# Altium PCB BA100_CPU_V1.0.PcbDoc
Units mm, origin at the board's own origin, x right, y up, seen from the top; angles counter-clockwise.
Board outline 152.4 x 101.6 mm, 2 copper layers (Top Layer, Bottom Layer); 85 components, 63 nets, 266 pads, 162 vias.
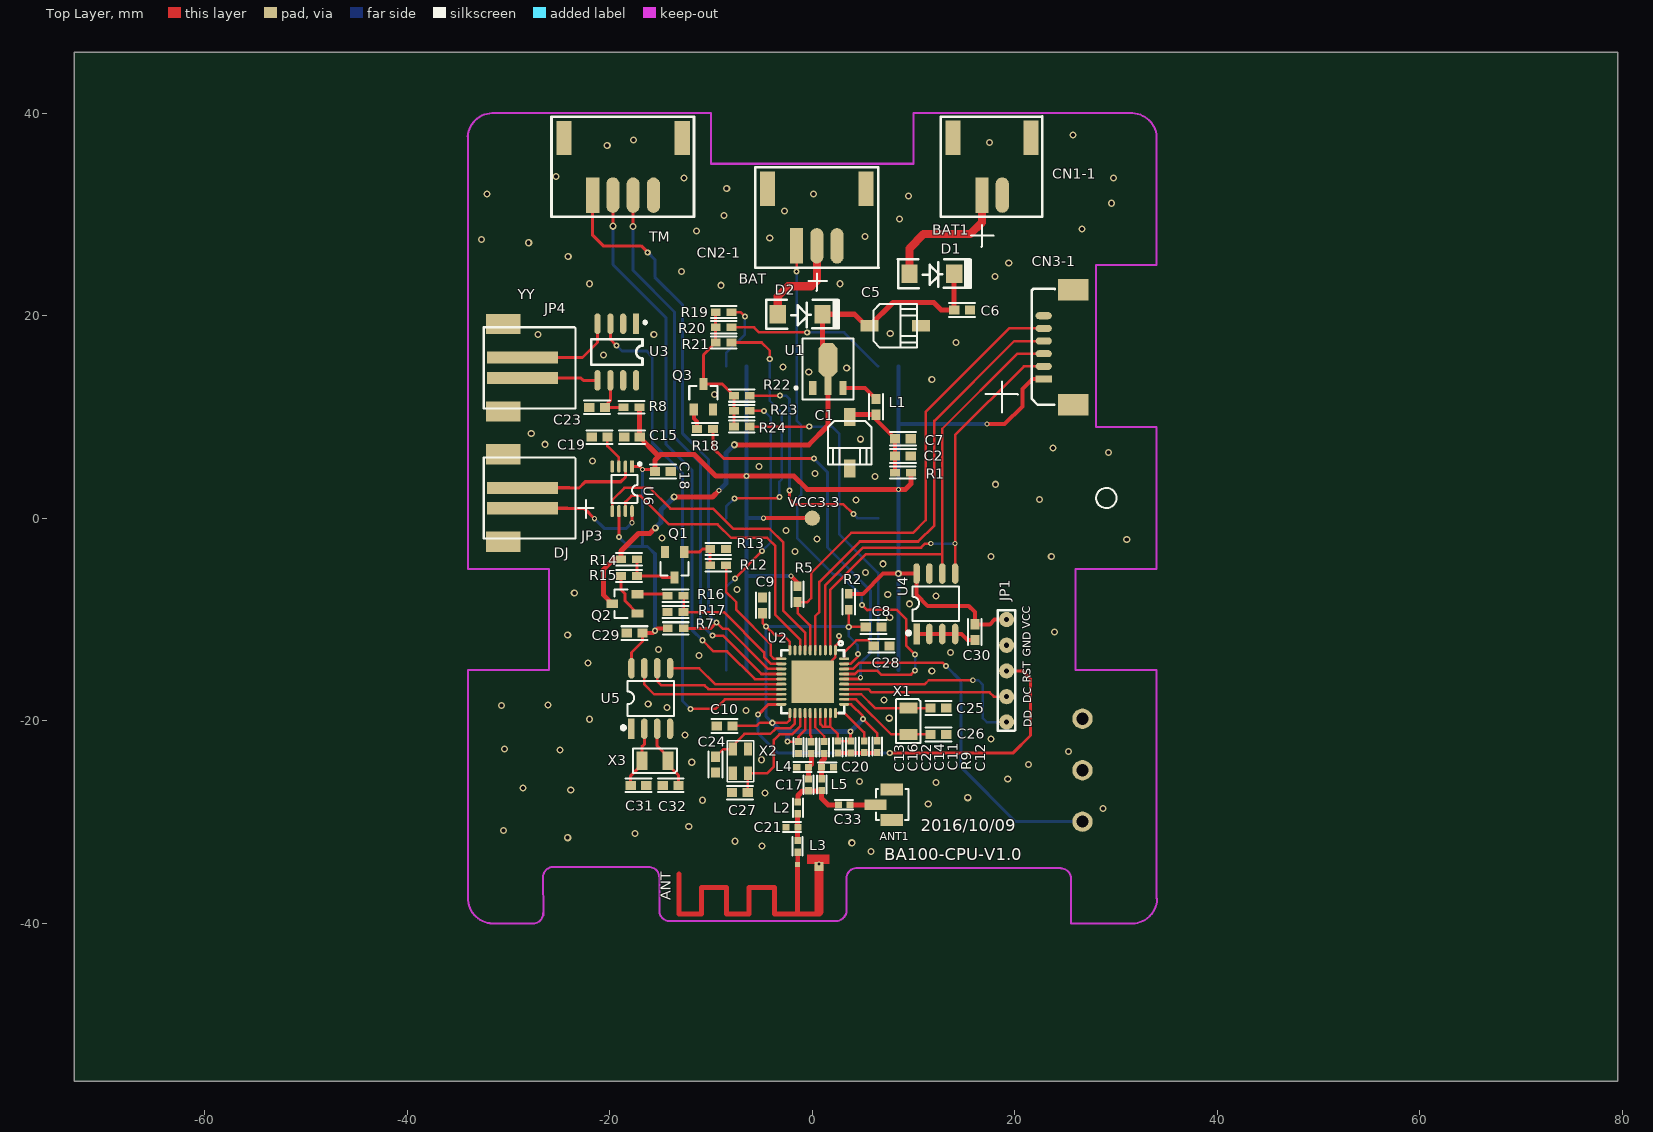
[diagram p0: Top Layer view]
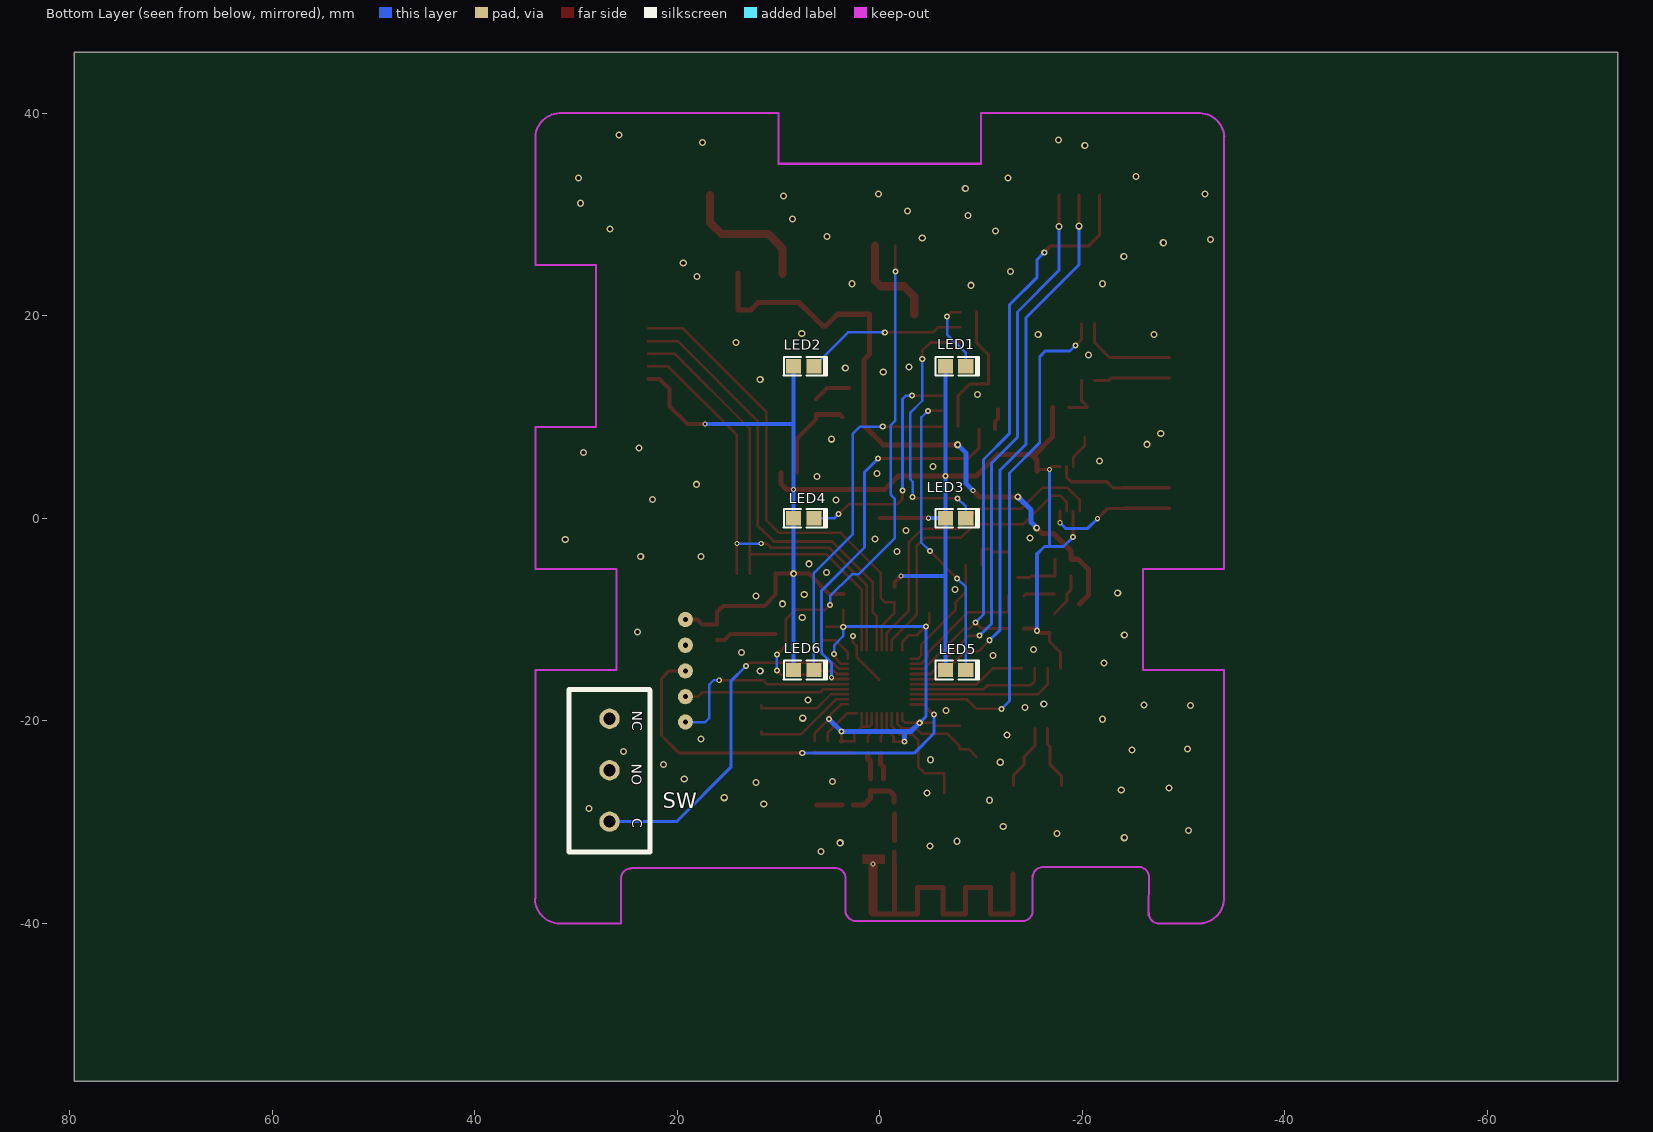
[diagram p1: Bottom Layer view, seen from below]

## Layer stack, top to bottom
Top Solder: solder mask 0.0102, Solder Resist, Dk 3.5
Top Layer: signal copper 0.0356
Dielectric1: dielectric 0.32, FR-4, Dk 4.8
Bottom Layer: signal copper 0.0356
Bottom Solder: solder mask 0.0102, Solder Resist, Dk 3.5

## Board outline
-72.871,-55.595 79.529,-55.595 79.529,46.005 -72.871,46.005

## Design rules (kind name [scope] priority, off if disabled: settings)
Clearance [All] p1: gap=0.3
ComponentClearance [All] p1 off: gap=0.254 collisioncheckmode=3 verticalgap=0.254 showdistances=FALSE
FabricationTestPointUsage TestPointUsage [All] p1: valid=0 allowmultiple=FALSE
FabricationTestpoint Testpoint [All] p1: side=3 testpointundercomponent=TRUE minsize=1.016 maxsize=2.54 preferedsize=1.524 minholesize=0 maxholesize=1.016 preferedholesize=0.813 testpointgrid=0.025 allowsidetop=TRUE allowsidebottom=TRUE usegrid=TRUE gridtolerance=0
Height [All] p1 off: minheight=0 maxheight=25.4 prefheight=12.7
PlaneClearance [All] p1: clearance=0.3
PlaneConnect [All] p1: planeconnectstyle=Relief reliefexpansion=0.508 reliefentries=4 reliefconductorwidth=0.3 reliefairgap=0.3
PolygonConnect PolygonConnect_1 [IsVia] p1: connectstyle=Direct reliefconductorwidth=0.254 reliefentries=4 polygonreliefangle="90 Angle" airgapwidth=0.254
PolygonConnect [All] p2: connectstyle=Relief reliefconductorwidth=0.254 reliefentries=4 polygonreliefangle="90 Angle" airgapwidth=0.254
RoutingVias [All] p1: holewidth=0.4 width=0.7 viastyle="Through Hole" minholewidth=0.3 minwidth=0.5 maxholewidth=0.7 maxwidth=1.2
SolderMaskExpansion [All] p1: expansion=0.102
UnpouredPolygon [All] p1: allowunpoured=FALSE
Width [All] p1: maxlimit=1 minlimit=0.1 preferedwidth=0.3 minimp=50.000000 maximp=50.000000 favimp=50.000000
23 further rules are at their usual default settings.

## Components (designator, comment, footprint, x,y, rotation, side; value= is the part's Value field where it differs from the comment)
ANT "ANT" ANT -1.451,-34.185 r180 top
ANT1 "ANT" IPEX 6.25,-28.3 r180 top
C1 "10uf/16V,electro" ECAP_10U_4.3*4.3 3.7,7.45 r270 top
C2 "0.1uf" PC7-*****-KO-0A_0603_TDK 8.95,6.15 r180 top
C5 "10uf/16V,electro" ECAP_10U_4.3*4.3 8.2,19 r0 top
C6 "0.1uf" PC5-*****-**-0A_0603_TDK 14.8,20.55 r180 top
C7 "2.2uf" PC5-*****-**-0A_0603_TDK 8.95,7.85 r0 top
C8 "1uf" PC5-*****-**-0A_0603_TDK 6.05,-10.741 r0 top
C9 "0.1uf" PC7-*****-KO-0A_0603_TDK -4.9,-8.6 r90 top
C10 "0.1uf" PC5-*****-**-0A_0603_TDK -8.661,-20.515 r180 top
C11 "0.1uf" PC7-*****-KQA0A_0402_YAGEO 3.789,-22.596 r270 top
C12 "0.1uf" PC7-*****-KQA0A_0402_YAGEO 6.419,-22.555 r270 top
C13 "0.1uf" PC7-*****-KQA0A_0402_YAGEO -1.361,-22.635 r270 top
C14 "220pf" PC7-*****-KQA0A_0402_YAGEO 2.52,-22.596 r90 top
C15 "1uf" PC5-*****-**-0A_0603_TDK -17.8,8 r0 top
C16 "18p" PC7-*****-KQA0A_0402_YAGEO -0.091,-22.655 r270 top
C17 "1p" PC7-*****-KQA0A_0402_YAGEO -0.371,-26.335 r270 top
C18 "0.1uf" PC5-*****-**-0A_0603_TDK -14.75,4.6 r180 top
C19 "1uf" PC5-*****-**-0A_0603_TDK -21,8 r0 top
C20 "1p" PC7-*****-KQA0A_0402_YAGEO 1.5,-24.6 r0 top
C21 "1p" PC7-*****-KQA0A_0402_YAGEO -2,-30.5 r0 top
C22 "18p" PC7-*****-KQA0A_0402_YAGEO 1.179,-22.645 r270 top
C23 "1uf" PC5-*****-**-0A_0603_TDK -21.25,10.95 r180 top
C24 "27p" PC7-*****-KO-0A_0603_TDK -9.551,-24.335 r90 top
C25 "15P" PC5-*****-**-0A_0603_TDK 12.45,-18.745 r180 top
C26 "15P" PC7-*****-KO-0A_0603_TDK 12.45,-21.35 r180 top
C27 "27p" PC7-*****-KO-0A_0603_TDK -7.15,-27.1 r0 top
C28 "1uf" PC5-*****-**-0A_0603_TDK 6.85,-12.6 r180 top
C29 "0.1uf" PC7-*****-KO-0A_0603_TDK -17.55,-11.35 r180 top
C30 "0.1uf" PC5-*****-**-0A_0603_TDK 16.05,-11.25 r90 top
C31 "15P" PC7-*****-KO-0A_0603_TDK -17.161,-26.375 r0 top
C32 "15P" PC7-*****-KO-0A_0603_TDK -13.981,-26.375 r180 top
C33 "20P" PC7-*****-KQA0A_0402_YAGEO 3.15,-28.3 r0 top
CN1-1 "CN1" PH2.0-2PIN-SMT 16.75,31.9 r0 top
CN2-1 "CN2" PH2.0-3PIN-SMT -1.55,26.9 r0 top
CN3-1 "touch" PH1.25-6PIN-SMT 22.849,13.745 r90 top
D1 "SS12" SS12-DIDEO 9.6,24.15 r0 top
D2 "SS12" SS12-DIDEO -3.4,20.15 r0 top
JP1 "debugger" ISCP-5PIN 19.189,-10.005 r270 top
JP3 "SIP2" PH2.0-2PIN-LSMT1 -28.611,1.985 r270 top
JP4 "SIP2" PH2.0-2PIN-LSMT1 -28.611,14.855 r270 top
L1 "BLM18HG102SN1" PC7-*****-KO-0A_0603_TDK 6.3,11 r270 top
L2 "1nH" PC5-*****-**-0A_0402_TDK -1.421,-28.6 r270 top
L3 "3nH" PC5-*****-**-0A_0402_TDK -1.451,-32.405 r270 top
L4 "2nH" PC5-*****-**-0A_0402_TDK -0.951,-24.575 r0 top
L5 "2nH" PC5-*****-**-0A_0402_TDK 0.929,-26.305 r270 top
LED1 "MA2X335" LED-0805 -7.5,15 r180 bottom locked
LED2 "MA2X335" LED-0805 7.5,15 r180 bottom locked
LED3 "MA2X335" LED-0805 -7.5,0 r180 bottom locked
LED4 "MA2X335" LED-0805 7.5,0 r180 bottom locked
LED5 "MA2X335" LED-0805 -7.5,-15 r180 bottom locked
LED6 "MA2X335" LED-0805 7.5,-15 r180 bottom locked
Q1 "BC847B" PTR-C0025-00-2A_2SC1623 -13.6,-4.6 r180 top
Q2 "BC857B" PTR-C0025-00-2A_2SC1623 -18.5,-8.45 r90 top
Q3 "SS8050" PTR-C0025-00-2A_2SC1623 -10.75,12 r0 top
R1 "0ohm" PRC-*****-AM-0A_0603 8.95,4.5 r0 top
R2 "0ohm" PRC-*****-AM-0A_0603 3.6,-8.25 r90 top
R5 "10k" PRC-*****-AM-0A_0603 -1.45,-7.5 r270 top
R7 "10k" PRC-*****-AM-0A_0603 -13.481,-10.875 r0 top
R8 "0ohm" PRC-*****-AM-0A_0603 -17.85,10.95 r0 top
R9 "56k" PRC-*****-BM-0A_0402 5.112,-22.569 r270 top
R12 "4.7K" PRC-*****-AM-0A_0603 -9.3,-4.65 r180 top
R13 "100K" PRC-*****-AM-0A_0603 -9.3,-3.05 r180 top
R14 "47K" PRC-*****-AM-0A_0603 -18.1,-4.05 r180 top
R15 "30K" PRC-*****-AM-0A_0603 -18.1,-5.7 r180 top
R16 "75K" PRC-*****-AM-0A_0603 -13.5,-7.65 r180 top
R17 "20K" PRC-*****-AM-0A_0603 -13.501,-9.265 r0 top
R18 "2.7K" PRC-*****-AM-0A_0603 -10.6,8.8 r180 top
R19 "560" PRC-*****-AM-0A_0603 -8.75,20.35 r180 top
R20 "560" PRC-*****-AM-0A_0603 -8.75,18.85 r180 top
R21 "560" PRC-*****-AM-0A_0603 -8.75,17.35 r180 top
R22 "560" PRC-*****-AM-0A_0603 -6.95,12.1 r180 top
R23 "560" PRC-*****-AM-0A_0603 -6.95,10.6 r180 top
R24 "560" PRC-*****-AM-0A_0603 -6.95,9.05 r180 top
SW "SW-weidong" SW-weidong 26.679,-24.885 r90 bottom
TM "TM" PH2.0-4PIN-SMT -21.681,31.905 r0 top (schematic designator JP2)
U1 "HT7333" SOT89 1.55,14.25 r0 top
U2 "CC2541" CC2530_QFN40 2.3,-13.05 r270 top
U3 "NVC080C" SOP-8 -17.4,19.2 r270 top
U4 "AT24C64N" PIC-00570-40-2A_93LC46B 12.2,-8.45 r90 top
U5 "DS1302Z" PIC-00570-40-2A_93LC46B -15.95,-17.8 r90 top
U6 "PT5102" PT5102 -17.8,5.1 r270 top
X1 "32.768KHZ,F=12.5P" FC-135 9.489,-20.045 r270 top
X2 "CY_3225" CY_3225 -7.421,-25.095 r90 top
X3 "32.768KHZ,F=6P" FC-135 -15.531,-23.955 r180 top

## Footprints (in the part's own frame and the unit in brackets; to place one, negate y for a bottom-side part, rotate by r counter-clockwise, add the part's x,y. Pads: shape width x height; smd on the part's side, far side on the other; paste and mask are expansions set on the pad)
ANT [mm]
  rect 0.5x0.5 smd: 1(0,0)
  rect 0.9x0.9 smd: 2(-2.1,0.2)
  Top Layer lines w0.5: 11.7,0.96 11.7,4.9 9.5,4.9 9.5,2.26 7,2.26 7,4.9 4.8,4.9 4.8,2.26 2.3,2.26 2.3,4.9 0,4.9 ; 0,0 0,4.9 ; -2.26,4.79 -2.21,4.84 -2.15,4.9 0,4.9
  Top Layer lines w0.9: -2.1,4.65 -2.1,0.2
CC2530_QFN40 [mm]
  oval 1x0.28 smd: 1(-0.011,-0.009) 2(-0.011,-0.509) 3(-0.011,-1.009) 4(-0.011,-1.509) 5(-0.011,-2.009) 6(-0.011,-2.509) 7(-0.011,-3.009) 8(-0.011,-3.509) 9(-0.011,-4.009) 10(-0.011,-4.509) 21(6.189,-4.509) 22(6.189,-4.009) 23(6.189,-3.509) 24(6.189,-3.009) 25(6.189,-2.509) 26(6.189,-2.009) 27(6.189,-1.509) 28(6.189,-1.009) 29(6.189,-0.509) 30(6.189,-0.009)
  oval 0.28x1 smd: 11(0.832,-5.359) 12(1.332,-5.359) 13(1.832,-5.359) 14(2.332,-5.359) 15(2.832,-5.359) 16(3.332,-5.359) 17(3.832,-5.359) 18(4.332,-5.359) 19(4.832,-5.359) 20(5.332,-5.359) 31(5.332,0.841) 32(4.832,0.841) 33(4.332,0.841) 34(3.832,0.841) 35(3.332,0.841) 36(2.832,0.841) 37(2.332,0.841) 38(1.832,0.841) 39(1.332,0.841) 40(0.832,0.841)
  rect 4.2x4.2 smd: 41(3.089,-2.259)
  silkscreen extent -0.91,-5.37 6.21,0.85
CY_3225 [mm]
  round 0.5 on Top Overlay: 0(-0.64,-2.06)
  rect 1.3x0.8 smd: 1(-0.095,-1.07) 2(2.293,-1.07) 3(2.293,0.428) 4(-0.095,0.428)
  silkscreen extent -0.91,-1.63 3.11,0.99
ECAP_10U_4.3*4.3 [mm]
  rect 1.8x1.1 smd: 1(2.54,0) 2(-2.54,0)
  silkscreen extent -2.15,-2.15 2.15,2.15
FC-135 [mm]
  rect 1.1x1.8 smd: 1(-1.3,0) 2(1.3,0)
  silkscreen extent -2.17,-1.2 2.15,1.19
IPEX [mm]
  rect 2.2x1 smd: 1(0,0)
  rect 2.2x1.2 smd: 2(-1.6,-1.5) 3(-1.6,1.49)
  silkscreen extent -3.24,-1.56 -0.05,1.51
ISCP-5PIN [mm]
  round 1.5 hole 0.5: 1(0,0) 2(2.54,0) 3(5.07,0) 4(7.62,0) 5(10.12,0)
  silkscreen extent -0.93,-0.89 11,0.84
LED-0805 [mm]
  rect 1.5x1.4 smd: A(-1,0) C(1,0)
  silkscreen extent -1.98,-0.93 2.28,0.93
PC5-*****-**-0A_0402_TDK [mm] "0402"
  rect 0.7x0.65 smd: 1(-0.58,0) 2(0.58,0)
  silkscreen extent -0.91,-0.48 0.89,0.48
PC5-*****-**-0A_0603_TDK [mm] "0603"
  rect 1.016x0.9 smd: 1(-0.775,0) 2(0.776,0)
  silkscreen extent -1.28,-0.68 1.28,0.68
PC7-*****-KO-0A_0603_TDK [mm] "0603"
  rect 1.016x0.9 smd: 1(-0.776,0) 2(0.776,0)
  silkscreen extent -1.28,-0.68 1.28,0.68
PC7-*****-KQA0A_0402_YAGEO [mm] "0402"
  rect 0.7x0.65 smd: 1(-0.58,0) 2(0.58,0)
  silkscreen extent -0.91,-0.48 0.89,0.48
PH1.25-6PIN-SMT [mm]
  rect 0.7x1.6 smd: 1(0,0)
  oval 0.7x1.6 smd: 2(1.25,0) 3(2.5,0) 4(3.75,0) 5(5,0) 6(6.25,0)
  rect 2.1x3 smd: 7(-2.55,-2.91) 8(8.8,-2.91)
  silkscreen extent -2.54,-1.11 8.89,1.18
PH2.0-2PIN-LSMT1 [mm]
  rect 1.2x7 smd: 1(-1.005,0) 2(1.005,0)
  rect 2x3.4 smd: 3(-4.318,-1.905) 4(4.318,-1.905)
  silkscreen extent -4,-3.84 4,5.24
PH2.0-2PIN-SMT [mm]
  rect 1.3x3.5 smd: 1(0.01,0.01)
  oval 1.3x3.5 smd: 2(2.01,0.01)
  rect 1.5x3.4 smd: 3(-2.85,5.65) 4(4.85,5.65)
  silkscreen extent -4.06,-2.15 5.98,7.8
PH2.0-3PIN-SMT [mm]
  rect 1.3x3.5 smd: 1(0,0)
  oval 1.3x3.5 smd: 2(2,0) 3(3.99,-0.01)
  rect 1.5x3.4 smd: 4(-2.86,5.64) 5(6.85,5.64)
  silkscreen extent -4.07,-2.17 8.1,7.75
PH2.0-4PIN-SMT [mm]
  rect 1.3x3.5 smd: 1(0,0)
  oval 1.3x3.5 smd: 2(2,0) 3(3.99,-0.01) 4(6,-0.01)
  rect 1.5x3.4 smd: 5(-2.85,5.64) 6(8.85,5.64)
  silkscreen extent -4.07,-2.16 10,7.75
PIC-00570-40-2A_93LC46B [mil] "SOIC-8"
  rect 80x25 smd: 1(-117.5,75)
  oval 80x25 smd: 2(-117.5,25) 3(-117.5,-25) 4(-117.5,-75) 5(117.5,-75) 6(117.5,-25) 7(117.5,25) 8(117.5,75)
  silkscreen extent -119,-90 67,111
PRC-*****-AM-0A_0603 [mm] "0603"
  rect 0.966x0.762 smd: 1(-0.785,0) 2(0.785,0)
  silkscreen extent -1.26,-0.6 1.27,0.6
PRC-*****-BM-0A_0402 [mm] "0402"
  rect 0.7x0.65 smd: 1(-0.58,0) 2(0.58,0)
  silkscreen extent -0.91,-0.48 0.89,0.48
PT5102 [mm]
  rect 1.2x0.35 smd: 1(0,0)
  oval 1.2x0.35 smd: 2(-0.006,-0.65) 3(-0.006,-1.3) 4(-0.006,-1.95) 5(4.4,-1.95) 6(4.4,-1.3) 7(4.4,-0.65) 8(4.4,0)
  silkscreen extent -0.38,-2.03 3.58,0.89
PTR-C0025-00-2A_2SC1623 [mm]
  rect 0.816x1.174 smd: B(-0.95,-1.25) C(0,1.251) E(0.95,-1.25)
  silkscreen extent -1.4,-0.26 1.4,1.04
SOP-8 [mil]
  rect 80x24 smd: 1(0,0)
  oval 80x24 smd: 2(0,-50) 3(0,-100) 4(0,-150) 5(220,-150) 6(220,-100) 7(220,-50) 8(220,0)
  silkscreen extent -10,-175 160,40
SOT89 [mm] "SOT-89; Body 4.6 x 4.25 mm, inc. leads (LxW max)"
  oct 1.9x3.3 smd: 0(0,1.388)
  rect 0.7x1.35 smd: 1(-1.5,-1.388) 3(1.5,-1.388)
  rect 0.7x1.8 smd: 2(0,-1.162)
  silkscreen extent -3.27,-2.51 2.5,3.49
SS12-DIDEO [mm]
  rect 1.6x1.8 smd: 1(4.41,-0.01) 2(-0.01,-0.01)
  silkscreen extent -1.14,-1.43 6.03,1.44
SW-weidong [mm]
  round 2 hole 1.2: 1(-5.08,0) 2(0,0) 3(5.08,0)
  silkscreen extent -8.08,-4.01 7.95,4.01

## Part data
C1 C2 C5 C6 C7 C8 C9 C10 C11 C12 C13 C14 C15 C16 C17 C18 C19 C20 C21 C22 C23 C24 C25 C26 C27 C28 C29 C30 C31 C32 C33: library part PC7_0402_YAGEO, "PC7-*****-KQA0A"
CN1-1 JP3 JP4: library part CON2, "Connector"
CN2-1: library part JP1_E524.03
CN3-1: library part CON6
D1 D2: library part PDD_SD101CWS, "PDD-00330-00-2A"
JP1: library part CON5
L1 L2 L3 L4 L5: library part PWL_18nH, "PWL-00195-00-20"
LED1 LED2 LED3 LED4 LED5 LED6: library part PDD_MA2X335, "LED"
Q1: library part PTR_2SC3356, "PTR-C0028-00-2A"
Q2: library part PTR-PNP
Q3: library part PTR_2SC5344SF-Y, "PTR-C0230-00-20**"
R1 R2 R5 R7 R8 R9 R12 R13 R14 R15 R16 R17 R18: library part PRC_0603, "PRC-*****-AM-0A_0603"
R19 R20 R21 R22 R23 R24: library part RES
TM: library part "HDR1X4 ***"
U1: library part LM117K
U3: library part NV040C
U5: library part DS1302
U6: library part Component_1_1
X1: library part CRYSTAL, "Crystal"
X3: library part PTR_16MHZ, "PTR-X0320-20-2A"

## Free pads (board coordinates)
  round 1.5 smd: 0(0,0)

## Via types
v1: diameter 0.7, hole 0.4, Top Layer to Bottom Layer, 108 vias
v2: diameter 0.6, hole 0.3, Top Layer to Bottom Layer, 37 vias
v3: diameter 0.508, hole 0.3, Top Layer to Bottom Layer, 13 vias
v4: diameter 0.7, hole 0.35, Top Layer to Bottom Layer, 4 vias

## Nets (pads, with @x,y where several pads share a name; then routed paths per layer and width w, separated by ;. In a path a pad name is that pad's centre, name@x,y a point inside that pad or via, vN(x,y) a via of type N, cw(c..) or ccw(c..) an arc to the next point about the centre after c; other vN are vias at no path point)
AD: R16.1 R17.2 U2.12 | length 13.6
  Top Layer w0.25: R16.1@-12.696,-7.665 -12.696,-9.245 R17.2 -8.735,-9.265 -4.75,-13.25 -4.75,-13.7 -4.068,-14.382 U2.12
DC: JP1.4 U2.34 | length 16.4
  Top Layer w0.25: U2.34 5.532,-16.882 5.85,-17.2 17.5,-17.2 17.925,-17.625 JP1.4
DD: JP1.5 U2.35 | length 19.8
  Top Layer w0.25: U2.35 11.118,-16.382 11.5,-16 v3(15.85,-16)
  Bottom Layer w0.25: v3(15.85,-16) 16.4,-16 16.85,-16.45 16.85,-19.75 17.225,-20.125 JP1.5
DJ1: U2.7 U6.5 | length 32.3
  Top Layer w0.25: U6.5 -19.75,1.8 -18.55,3 -16.05,3 -14,0.95 -9.8,0.95 -7.8,-1.05 -4.2,-1.05 -2.85,-2.4 -2.85,-9.15 -0.709,-11.291 U2.7
DJ2: U2.8 U6.7 | length 29.3
  Top Layer w0.25: U6.7 -18.45,1.6 -17.85,2.2 -16.95,2.2 -14.15,-0.6 -9.35,-0.6 -8,-1.95 -4.45,-1.95 -3.65,-2.75 -3.65,-9.55 -1.209,-11.991 U2.8
GND: C1.1 C2.1 C5.1 C6.1 C7.2 C8.2 C9.2 C10.2 C11.2 C12.2 C13.2 C14.1 C15.1 C18.1 C19.1 C20.2 C21.1 C23.2 C24.1 C25.1 C26.1 C27.1 C28.1 C29.2 C30.1 C31.2 C32.2 CN1-1.2 CN2-1.3 CN3-1.6 JP1.2 L4.1 Q1.E Q3.E R9.2 R13.1 R17.1 TM.4 U1.1 U2.1 U2.41 U3.7 U4.1 U4.2 U4.3 U4.4 U4.7 U5.4 U6.4 X2.2 X2.4 | length 15.3
  Top Layer w0.25: U2.41@0.041,-15.959 2.291,-13.709 U2.1 2.291,-12.609 2.65,-12.25 v2(2.65,-11.65)
  Top Layer w0.4: C14.1 6.378,-23.176 C12.2 ; U4.1 U4.2 U4.3 U4.4 14.735,-11.435 15.325,-12.025 C30.1
  other v1: 5.8,-32.9 -4.95,-32.35 3.9,-32.05 -7.65,-31.9 -24.15,-31.55 -17.5,-31.15 -30.5,-30.85 -12.2,-30.45 28.7,-28.65 11.45,-28.2 -10.85,-27.85 15.35,-27.6 -4.65,-27.15 -23.85,-26.85 -28.55,-26.65 12.2,-26.1 4.65,-26 19.3,-25.75 21.35,-24.3 -11.9,-24.1 -5,-23.85 25.3,-23.05 -24.9,-22.9 -30.4,-22.8 17.65,-21.8 -12.55,-21.4 -22,-19.85 7.6,-19.75 -6.55,-19 -14.35,-18.7 -30.7,-18.5 -26.1,-18.45 -16.2,-18.35 7.1,-17.95 11.8,-15.1 -22.15,-14.3 -11.2,-13.55 13.65,-13.25 -15.2,-12.95 -24.15,-11.55 23.9,-11.25 7.65,-9.8 9.6,-8.45 12.2,-7.7 7.45,-7.55 -23.5,-7.4 -7.45,-7.05 5.25,-5.35 7,-4.5 17.65,-3.8 23.6,-3.8 -1.7,-3.3 31.05,-2.1 0.45,-2.05 -14.85,-1.95 -2.6,-1.2 4.3,1.8 22.45,1.85 18.1,3.35 6.2,4.1 0.25,4.4 -5.25,5.1 -21.7,5.65 29.25,6.5 23.75,6.95 -26.4,7.3 4.75,7.8 -27.75,8.35 -9.65,12.2 11.8,13.7 -0.35,14.45 3.4,14.85 -2.9,14.95 -20.6,16.1 14.2,17.35 -27.1,18.15 -15.65,18.15 7.7,18.25 -9,23 -22,23.15 2.75,23.15 18.05,23.85 -12.9,24.35 19.4,25.2 -24.1,25.85 -28,27.2 -32.65,27.5 -4.2,27.65 5.2,27.8 -11.45,28.35 26.65,28.55 8.6,29.55 -8.7,29.9 -2.75,30.35 29.55,31.1 9.5,31.8 -32.1,32 0.1,32 -8.45,32.55 -12.65,33.6 29.75,33.6 -25.3,33.75 -20.25,36.8 17.5,37.1 -17.65,37.35 25.75,37.85
  other v3: 0.65,-34.15
HI: CN3-1.5 R5.2 U2.6 | length 48.4
  Top Layer w0.25: R5.2@-1.45,-8.335 -1.45,-9.35 -0.209,-10.591 U2.6 ; R5.2 -0.485,-8.285 -0.1,-7.9 -0.1,-5.4 3.85,-1.45 9.95,-1.45 11.2,-0.2 11.2,10.5 19.445,18.745 CN3-1.5
LED_BACK: R18.1 U2.36 | length 38.3
  Top Layer w0.3: R18.1 -9.815,6.965 -8.75,5.9 v2(0.15,5.9) ; U2.36 4.618,-15.882 v3(4.75,-15.75)
  Bottom Layer w0.3: v2(0.15,5.9) 1.5,4.55 1.5,-2.9 5.75,-7.15 5.75,-13.3 4.75,-14.3 v3(4.75,-15.75)
NetANT1_1: ANT1.1 C33.2 | length 2.5
  Top Layer w0.5: C33.2 ANT1.1
NetANT_1: ANT.1 L3.2 | length 1.2
  Top Layer w0.45: ANT.1 L3.2
NetC1_2: C1.2 C2.2 C7.1 L1.2 R1.1 | length 9.2
  Top Layer w0.3: R1.1 R1.1@8.175,4.51
  Top Layer w0.4: C1.2 C1.2@3.935,10.225 ; L1.2 6.3,9.725 C7.1 R1.1@8.175,4.51
  Top Layer w0.5: C1.2@3.935,10.225 L1.2
NetC8_1: C8.1 C9.1 C10.1 C11.1 C12.1 C13.1 C14.2 R2.1 U2.10 U2.21 U2.24 U2.27 U2.28 U2.29 U2.31 U2.39 | length 67.4
  Top Layer w0.25: C10.1 -5.515,-20.515 -5.2,-20.2 v2(-3.95,-20.2) -2.5,-20.2 -2.209,-19.909 U2.21 ; C9.1 -4.9,-10.35 v2(-4.55,-10.7) -3.7,-11.55 -2.9,-11.55 -2.209,-12.241 U2.10 ; v2(-2.45,-22.055) C13.1 ; C13.1@-1.459,-21.956 C13.1 ; U2.24 -0.709,-20.909 -1.361,-21.561 C13.1 ; U2.27 0.791,-20.341 1.041,-20.591 1.291,-20.591 ; U2.28 1.291,-20.591 ; U2.29 1.791,-20.509 1.709,-20.591 ; U2.31 3.832,-18.382 5,-19.55 v2(5,-19.839) 6.419,-21.258 C12.1 ; U2.39 3.768,-14.382 4.5,-13.65 v2(4.5,-13.4) ; R2.1 v2(3.6,-10.741) C8.1 ; C11.1 C14.2 2.52,-21.32 1.791,-20.591 1.709,-20.591 ; 1.291,-20.591 1.709,-20.591
  Top Layer w0.3: C11.1 v2(3.789,-21.05)
  Bottom Layer w0.25: v2(3.6,-10.741) 3.6,-11.65 4.5,-12.55 v2(4.5,-13.4)
  Bottom Layer w0.3: v2(-3.95,-20.2) -4.55,-19.6 v2(-4.55,-10.7) 3.558,-10.7 v2(3.6,-10.741)
  Bottom Layer w0.5: v2(-3.95,-20.2) -3.1,-21.05 v2(3.789,-21.05) v2(5,-19.839) ; v2(-2.45,-22.055) -2.45,-21.1
NetC16_1: C16.1 U2.25 | length 2.9
  Top Layer w0.25: U2.25 -0.209,-21.432 -0.091,-21.55 C16.1
NetC16_2: C16.2 C17.1 L4.2 | length 2.6
  Top Layer w0.5: C17.1 L4.2 -0.091,-24.295 C16.2
NetC17_2: C17.2 C33.1 L2.1 L5.2 | length 5.9
  Top Layer w0.5: L2.1 -1.421,-27.371 -0.965,-26.915 C17.2 0.899,-26.915 L5.2 0.929,-27.679 1.55,-28.3 C33.1
NetC19_2: C19.2 U6.3 | length 3.4
  Top Layer w0.25: C19.2 -20.224,7.124 -19.1,6 U6.3
NetC20_1: C20.1 C22.2 L5.1 | length 2.6
  Top Layer w0.5: L5.1 0.92,-25.716 C20.1 0.92,-24.03 1.179,-23.771 C22.2
NetC21_2: C21.2 L2.2 L3.1 | length 2.6
  Top Layer w0.5: L3.1 L2.2@-1.451,-29.21
NetC22_1: C22.1 U2.26 | length 3.2
  Top Layer w0.25: U2.26 0.291,-20.641 1.179,-21.529 C22.1
NetC23_1: C23.1 R8.1 U3.6 | length 4.6
  Top Layer w0.3: C23.1 R8.1 ; C23.1@-20.475,11.075 -19.94,11.61 U3.6
NetC24_2: C24.2 U2.22 X2.3 | length 10.4
  Top Layer w0.25: C24.2 -8.794,-22.802 X2.3 -7.849,-22.449 -6.7,-21.3 -4.15,-21.3 -3.6,-20.75 -2.2,-20.75 -1.709,-20.259 U2.22
NetC25_2: C25.2 U2.33 X1.1 | length 9.1
  Top Layer w0.25: U2.33 4.832,-17.382 6.195,-18.745 X1.1 C25.2
NetC26_2: C26.2 U2.32 X1.2 | length 10
  Top Layer w0.25: U2.32 4.332,-17.882 7.795,-21.345 X1.2 11.669,-21.345 C26.2 ; C26.2@11.669,-21.095 C26.2@11.675,-21.1
NetC27_2: C27.2 U2.23 X2.1 | length 11.8
  Top Layer w0.25: C27.2 -6.351,-27.076 X2.1 -4.49,-25.19 -3.8,-24.5 -3.8,-21.9 -3.25,-21.35 -2,-21.35 -1.209,-20.559 U2.23
NetC28_2: C28.2 U2.40 | length 4.3
  Top Layer w0.25: U2.40 3.141,-13.259 4.35,-12.05 5.524,-12.05 C28.2
NetC31_1: C31.1 U5.2 X3.2 | length 6.2
  Top Layer w0.3: C31.1 -17.936,-25.436 -16.831,-24.331 X3.2 -16.831,-22.581 -16.585,-22.335 U5.2
NetC32_1: C32.1 U5.3 X3.1 | length 6.5
  Top Layer w0.3: U5.3 -15.315,-22.485 -14.231,-23.569 X3.1 -14.231,-24.369 -13.205,-25.395 C32.1
NetCN1-1_1: CN1-1.1 D1.2 | length 13.4
  Top Layer w0.8: D1.2 9.59,26.64 11,28.05 15.6,28.05 16.76,29.21 CN1-1.1
NetCN2-1_2: CN2-1.2 D2.2 | length 9.7
  Top Layer w0.8: D2.2 -3.41,21.89 -2.4,22.9 -0.1,22.9 0.45,23.45 CN2-1.2
NetJP4_1: JP4.1 U3.4 | length 9.9
  Top Layer w0.3: JP4.1 -22.69,15.86 -21.21,17.34 U3.4
NetJP4_2: JP4.2 U3.5 | length 7.5
  Top Layer w0.3: JP4.2 -22.85,13.85 -22.612,13.612 U3.5
NetL1_1: L1.1 U1.3 | length 3.7
  Top Layer w0.4: U1.3 5.213,12.862 L1.1
NetLED1_C: LED1.C R19.1 | length 7.2
  Top Layer w0.25: R19.1 -7.1,20.35 v2(-6.65,19.9)
  Bottom Layer w0.25: LED1.C -8.5,16.3 -6.65,18.15 v2(-6.65,19.9)
NetLED2_C: LED2.C R20.1 | length 16.1
  Top Layer w0.25: R20.1 -5.75,18.85 -5.25,18.35 v2(-0.5,18.35)
  Bottom Layer w0.25: v2(-0.5,18.35) 3.15,18.35 LED2.C
NetLED3_C: LED3.C R21.1 | length 25.9
  Top Layer w0.25: R21.1 -5,17.35 -4.2,16.55 v2(-4.2,15.7) ; v2(-7.7,1.95) -3.4,1.95 v2(-3.25,2.1)
  Bottom Layer w0.25: LED3.C -8.5,1.15 v2(-7.7,1.95) ; v2(-4.2,15.7) -4.2,11.6 -3,10.4 -3,3.85 -3.25,3.6 v2(-3.25,2.1)
NetLED4_C: LED4.C R22.1 | length 23.4
  Top Layer w0.25: R22.1 v2(-3.2,12.1) ; v2(-2.25,2.75) -2.25,1.9 -1.75,1.4 3.05,1.4 v2(4.05,0.4)
  Bottom Layer w0.25: v2(-3.2,12.1) -2.6,12.1 -2.25,11.75 v2(-2.25,2.75) ; v2(4.05,0.4) 4.45,0 LED4.C
NetLED5_C: LED5.C R23.1 | length 29.1
  Top Layer w0.25: v2(-7.65,-5.95) v2(-4.95,-3.25) ; R23.1 v2(-4.75,10.6)
  Bottom Layer w0.25: LED5.C -8.5,-6.8 v2(-7.65,-5.95) ; v2(-4.95,-3.25) -4.1,-2.4 -4.1,9.95 v2(-4.75,10.6)
NetLED6_C: LED6.C R24.1 | length 34
  Top Layer w0.25: R24.1 v2(-0.3,9.05)
  Bottom Layer w0.25: v2(-0.3,9.05) 1.95,9.05 2.65,8.35 2.65,-1.55 6.5,-5.4 LED6.C
NetQ1_B: Q1.B R12.2 R13.2 | length 4.3
  Top Layer w0.3: Q1.B -11.15,-3.35 -10.85,-3.05 R13.2 R12.2
NetQ1_C: Q1.C R14.1 R15.1 | length 5.4
  Top Layer w0.3: R14.1 R15.1 -15,-5.7 -14.849,-5.851 Q1.C
NetQ2_B: Q2.B R15.2 | length 4.4
  Top Layer w0.3: R15.2 -18.885,-7.065 -18.5,-7.45 -18.5,-8.15 Q2.B
NetQ2_E: Q2.E R16.2 | length 3.1
  Top Layer w0.3: Q2.E -14.431,-7.5 R16.2@-14.266,-7.665
NetQ3_B: Q3.B R18.2 | length 2.1
  Top Layer w0.4: Q3.B -11.7,9.85 -11.385,9.535 R18.2
NetQ3_C: Q3.C R19.2 R20.2 R21.2 R22.2 R23.2 R24.2 | length 14.1
  Top Layer w0.3: R19.2 R20.2 R21.2 -10.75,16.135 Q3.C -8.886,13.251 R22.2 R23.2 R24.2
NetR9_1: R9.1 U2.30 | length 4.5
  Top Layer w0.25: U2.30 3.201,-19.239 5.112,-21.15 R9.1
O1: JP3.1 U6.2 | length 11.7
  Top Layer w0.3: -24.01,2.99 -23.04,2.99 -22.43,3.6 -18.9,3.6 -18.45,4.05 U6.2
  Top Layer w0.35: JP3.1 -24.01,2.99
O2: JP3.2 U6.8 | length 13
  Top Layer w0.3: -24.18,0.98 -22.53,0.98 v3(-21.5,-0.05) ; v3(-17.8,-0.45) U6.8
  Top Layer w0.35: JP3.2 -24.18,0.98
  Bottom Layer w0.3: v3(-21.5,-0.05) -20.55,-1 -18.35,-1 v3(-17.8,-0.45)
P10: R12.1 U2.11 | length 11.9
  Top Layer w0.25: R12.1 -8.515,-7.285 -7.5,-8.3 -7.5,-9.05 -4.1,-12.45 -4.1,-13.55 -3.768,-13.882 U2.11
P16: SW.1 U2.38 | length 35.3
  Top Layer w0.25: U2.38 4.018,-14.882 4.65,-14.25 12.85,-14.25 v2(13.2,-14.6)
  Bottom Layer w0.3: v2(13.2,-14.6) 14.7,-16.1 14.7,-24.6 20.065,-29.965 SW.1
RST: JP1.3 U2.20 | length 41.3
  Top Layer w0.3: v2(-5.35,-19.4) -4.332,-18.382 U2.20 ; v2(7.65,-23.2) 19.8,-23.2 21.55,-21.45 21.55,-15.85 20.775,-15.075 JP1.3
  Bottom Layer w0.3: v2(-5.35,-19.4) -5.35,-21.25 -3.4,-23.2 v2(7.65,-23.2)
RST-S: CN2-1.1 U2.37 | length 56.8
  Top Layer w0.25: v2(-1.55,24.35) CN2-1.1 ; U2.37 4.218,-15.382 4.55,-15.05 6.4,-15.05 6.8,-15.45 9.75,-15.45 v2(10.15,-15.05) ; v2(4.9,-8.55) 5.45,-9.1 5.525,-9.025 8.325,-9.025 9.3,-10 9.3,-12.6 v2(10.15,-13.45)
  Bottom Layer w0.25: v2(-1.55,24.35) -1.55,9.65 -1.1,9.2 -1.1,2.3 -1.5,1.9 -1.5,-1.95 2.1,-5.55 2.75,-5.55 4.9,-7.7 v2(4.9,-8.55) ; v2(10.15,-15.05) v2(10.15,-13.45)
SCL: CN3-1.3 U2.2 U4.6 | length 45.9
  Top Layer w0.25: U2.2 1.791,-7.059 5.3,-3.55 12.835,-3.55 ; U4.6 12.835,-3.55 ; CN3-1.3 20.245,16.245 12.835,8.835 12.835,-3.55
SDA: CN3-1.2 U2.3 U4.5 | length 46.2
  Top Layer w0.25: U2.3 1.291,-6.609 5,-2.9 10.75,-2.9 11.15,-2.5 v3(11.7,-2.5) ; U4.5 v3(14.105,-2.5) 14.105,8.205 20.895,14.995 CN3-1.2
  Bottom Layer w0.25: v3(11.7,-2.5) v3(14.105,-2.5)
T-CE: U2.16 U5.5 | length 11.6
  Top Layer w0.25: U5.5 -11.167,-14.815 -9.6,-16.382 U2.16
T-I/O: U2.17 U5.6 | length 13.9
  Top Layer w0.25: U5.6 -15.315,-16.085 -14.9,-16.5 -10.632,-16.5 -10.25,-16.882 U2.17
T-SCLK: U2.18 U5.7 | length 15.5
  Top Layer w0.25: U5.7 -16.585,-16.415 -15.618,-17.382 U2.18
TM-DATA: R7.2 TM.1 U2.13 | length 61.2
  Top Layer w0.25: v2(-9.45,-10.3) -8.85,-10.9 -8.35,-10.9 -4.368,-14.882 U2.13
  Top Layer w0.3: TM.1 -21.681,27.931 -20.65,26.9 -16.9,26.9 v2(-16.25,26.25) ; R7.2 -10.025,-10.875 v2(-9.45,-10.3)
  Bottom Layer w0.3: v2(-16.25,26.25) -15.55,25.55 -15.55,23.8 -12.8,21.05 -12.8,8.35 -10.25,5.8 -10.25,-9.5 v2(-9.45,-10.3)
TM-LED+: TM.2 U2.15 | length 57
  Top Layer w0.25: v2(-10.85,-12.05) -9.75,-13.15 -8.4,-13.15 -5.668,-15.882 U2.15
  Top Layer w0.3: v1(-19.681,28.831) TM.2
  Bottom Layer w0.3: v1(-19.681,28.831) -19.681,25.031 -14.45,19.8 -14.45,7.3 -11.9,4.75 -11.9,-11 v2(-10.85,-12.05)
TM-LED-: TM.3 U2.14 | length 55.1
  Top Layer w0.25: v2(-9.85,-11.6) -8.8,-11.6 -5.018,-15.382 U2.14
  Top Layer w0.3: v1(-17.691,28.821) TM.3
  Bottom Layer w0.3: v1(-17.691,28.821) -17.691,24.459 -13.6,20.368 -13.6,8 -11.05,5.45 -11.05,-10.4 v2(-9.85,-11.6)
VCC: C15.2 C18.2 C29.1 C30.2 CN3-1.1 JP1.1 LED1.A LED2.A LED3.A LED4.A LED5.A LED6.A pad.0 R1.2 R2.2 R5.1 R7.1 R8.2 U4.8 U5.8 U6.1 U6.6 | length 175.9
  Top Layer w0.3: v2(-19.1,-1.85) U6.6 ; U5.8 -17.855,-13.255 -16.775,-12.175 C29.1 ; U6.1 -17.05,5.1 v3(-16.75,4.8) -15.726,4.8 C18.2 ; C15.2@-17.065,8.041 C15.2
  Top Layer w0.4: C29.1 -15.75,-11.35 v2(-15.512,-11.112) -15.275,-10.875 R7.1 ; v3(-4.8,0) pad.0 ; v3(-2.1,-5.7) -1.45,-6.35 R5.1@-1.45,-6.765 ; R2.2 4.985,-7.465 6.984,-5.466 U4.8 10.295,-7.545 11.4,-8.65 15.45,-8.65 16.05,-9.25 C30.2 17.526,-10.474 17.995,-10.005 JP1.1 ; v3(17.25,9.3) 19,9.3 20.75,11.05 20.75,12.75 21.745,13.745 CN3-1.1 CN3-1.1@22.844,13.75
  Top Layer w0.5: C15.2@-17.065,8.041 R8.2 ; C15.2 -15.324,6.3 ; C18.2 -15.526,5.751 -14.977,6.3 -11.65,6.3 -9.5,4.15 -1.8,4.15 -0.5,2.85 v3(8.5,2.85) 9.2,2.85 9.735,3.385 R1.2
  Bottom Layer w0.3: v2(-19.1,-1.85) -18.15,-2.8 -16.75,-2.8 ; v3(-16.75,4.8) -16.75,-2.8 ; -15.512,-3.55 -16.262,-2.8 -16.75,-2.8
  Bottom Layer w0.4: v2(-15.512,-11.112) -15.512,-3.55 ; LED5.A -6.5,-5.7 ; LED1.A v2(-6.5,4.15) LED3.A ; v3(-4.8,0) LED3.A ; v3(-2.1,-5.7) -6.5,-5.7 ; LED6.A LED4.A v3(8.5,2.85) 8.5,9.3 ; LED2.A 8.5,9.3 ; v3(17.25,9.3) 8.5,9.3 ; -6.5,-5.7 LED3.A
  other v4: 8.5,-5.466
VDD: C5.2 C6.2 D1.1 D2.1 Q2.C R14.2 U1.0 U1.2 | length 64.2
  Top Layer w0.5: Q2.C -20.6,-7.601 -20.6,-5.05 -19.6,-4.05 R14.2 -18.885,-3.235 -17.15,-1.5 -16.05,-1.5 v4(-15.5,-0.95) ; v4(-13.65,2.1) -9.85,2.1 v3(-9.2,2.75) ; v4(-7.7,7.25) -0.35,7.25 1.55,9.15 U1.2 U1.0 1.01,16.178 D2.1 4.16,20.14 5.3,19 C5.2 7.96,21.3 12,21.3 12.736,20.564 14.01,20.564 D1.1
  Bottom Layer w0.5: v4(-15.5,-0.95) -14.95,-0.4 -14.95,0.8 v4(-13.65,2.1) ; v3(-9.2,2.75) -8.5,3.45 -8.5,6.45 v4(-7.7,7.25)
XERS: CN3-1.4 U2.5 | length 44.9
  Top Layer w0.25: U2.5 0.291,-9.659 0.7,-9.25 0.7,-6.3 4.7,-2.3 10.45,-2.3 12.05,-0.7 12.05,9.6 19.945,17.495 CN3-1.4
YY: U2.19 U3.3 | length 52.1
  Top Layer w0.25: v2(-12.025,-18.825) -9.575,-18.825 -8.632,-17.882 U2.19
  Top Layer w0.28: U3.3 -19.94,17.64 v2(-19.35,17.05)
  Bottom Layer w0.28: v2(-19.35,17.05) -18.8,16.5 -16.35,16.5 -15.8,15.95 -15.8,7.45 -12.8,4.45 -12.8,-18.05 v2(-12.025,-18.825)
pads on no net: ANT1.2 ANT1.3 ANT.2 CN1-1.3 CN1-1.4 CN2-1.4 CN2-1.5 CN3-1.7 CN3-1.8 JP3.3 JP3.4 JP4.3 JP4.4 SW.2 SW.3 TM.5 TM.6 U2.4 U2.9 U3.1 U3.2 U3.8 U5.1 X2.0

## Keep-outs
Keep-Out Layer:
  lines w0.2: -34.021,37.675 cw(c-31.526,37.509) -31.361,40.004 ; -34,-37.665 -34,-15 -26,-15 -26,-5 -34,-5 -34,37.805 ; -33.991,-37.215 ccw(c-31.508,-37.51) -31.804,-39.993 ; -31.821,-40.015 -27.601,-40.015 ; -31.571,40 -10,40 -10,35 10,35 10,40 31.519,40 ; -27.598,-40.008 ccw(c-27.57,-39.008) -26.571,-38.965 ; -26.575,-35.265 -26.564,-39.215 ; -26.573,-35.321 cw(c-25.58,-35.438) -25.463,-34.445 ; -25.561,-34.435 -16.141,-34.435 ; -16.181,-34.445 cw(c-16.11,-35.442) -15.113,-35.372 ; -15.101,-38.915 -15.101,-35.305 ; -15.101,-38.825 ccw(c-14.102,-38.779) -13.965,-39.769 ; -14.024,-39.785 2.333,-39.785 ; 2.359,-39.785 ccw(c2.279,-38.665) 3.399,-38.585 ; 3.392,-35.603 cw(c4.389,-35.532) 4.469,-34.535 ; 3.399,-38.815 3.399,-35.545 ; 4.499,-34.545 24.535,-34.565 ; 24.546,-34.565 cw(c24.534,-35.58) 25.549,-35.591 ; 25.529,-40.035 31.849,-40.035 ; 25.549,-39.965 25.549,-35.58 ; 31.359,39.995 cw(c31.509,37.5) 34.005,37.65 ; 31.841,-40.018 ccw(c31.537,-37.537) 34.037,-37.576 ; 34,-37.537 34,-15 26,-15 26,-5 34,-5 34,9 28,9 28,25 34,25 34,37.735

## Other copper
Top Layer:
  rectangle net GND: -0.5,-34.15 1.706,-33.2
  rectangle net GND: -0.065,-34.15 1.4,-33.55

## Silkscreen, mask and mechanical layers (free items; w line width, h text height)
Top Overlay:
  circle w0.2: c29.03,1.99 r1
  lines w0.2: -23.141,0.995 -21.631,0.995 -21.621,0.985 ; -22.321,0.035 -22.321,1.815 ; -0.351,23.435 1.439,23.435 1.449,23.445 ; 0.419,22.455 0.459,22.495 0.459,24.175 ; 15.689,27.905 17.899,27.905 17.909,27.915 ; 16.709,26.795 16.739,26.825 16.739,28.975 ; 17.109,12.265 20.249,12.265 20.309,12.205 ; 18.739,10.415 18.739,13.495
  text "BAT1" at 11.85,28 h1
  text "BAT" at -7.25,23.15 h1
  text "YY" at -29.1,21.6 h1
  text "VCC3.3" at -2.4,1.1 h1
  text "DJ" at -25.55,-3.9 h1
  text "VCC" at 21.529,-10.935 h0.8 r90
  text "GND" at 21.559,-13.695 h0.8 r90
  text "RST" at 21.559,-16.245 h0.8 r90
  text "DC" at 21.629,-18.265 h0.8 r90
  text "DD" at 21.659,-20.655 h0.8 r90
  text "2016/10/09" at 10.7,-30.9 h1.2
  text "BA100-CPU-V1.0" at 7.1,-33.75 h1.2
Mechanical 1:
  circle w0.2: c-31,-37.5 r1
  circle w0.2: c-31,38 r1
  circle w0.2: c31,-37.5 r1
  circle w0.2: c31,38 r1
  lines w0.2: -27.601,-40.015 -27.571,-39.985 ; -25.571,-34.445 -25.561,-34.435 ; 31.849,-40.035 31.899,-39.985

## Text inside footprints (layer, text, board x,y; h text height)
SW: Bottom Overlay "C" at 24.429,-29.615 h1 r90; Bottom Overlay "NO" at 24.479,-24.245 h1 r90; Bottom Overlay "NC" at 24.449,-18.995 h1 r90